# Altium PCB ESP32P4 SOM.PcbDoc (part 3 of 4)
Units mm, origin at the board's own origin, x right, y up, seen from the top; angles counter-clockwise.
Board outline 86.37 x 63.05 mm, 4 copper layers (L1-TOP, L2-GND, L3-GND/PWR, L4-BOT), stack 1.57 mm thick; 203 components, 172 nets, 736 pads, 1001 vias.
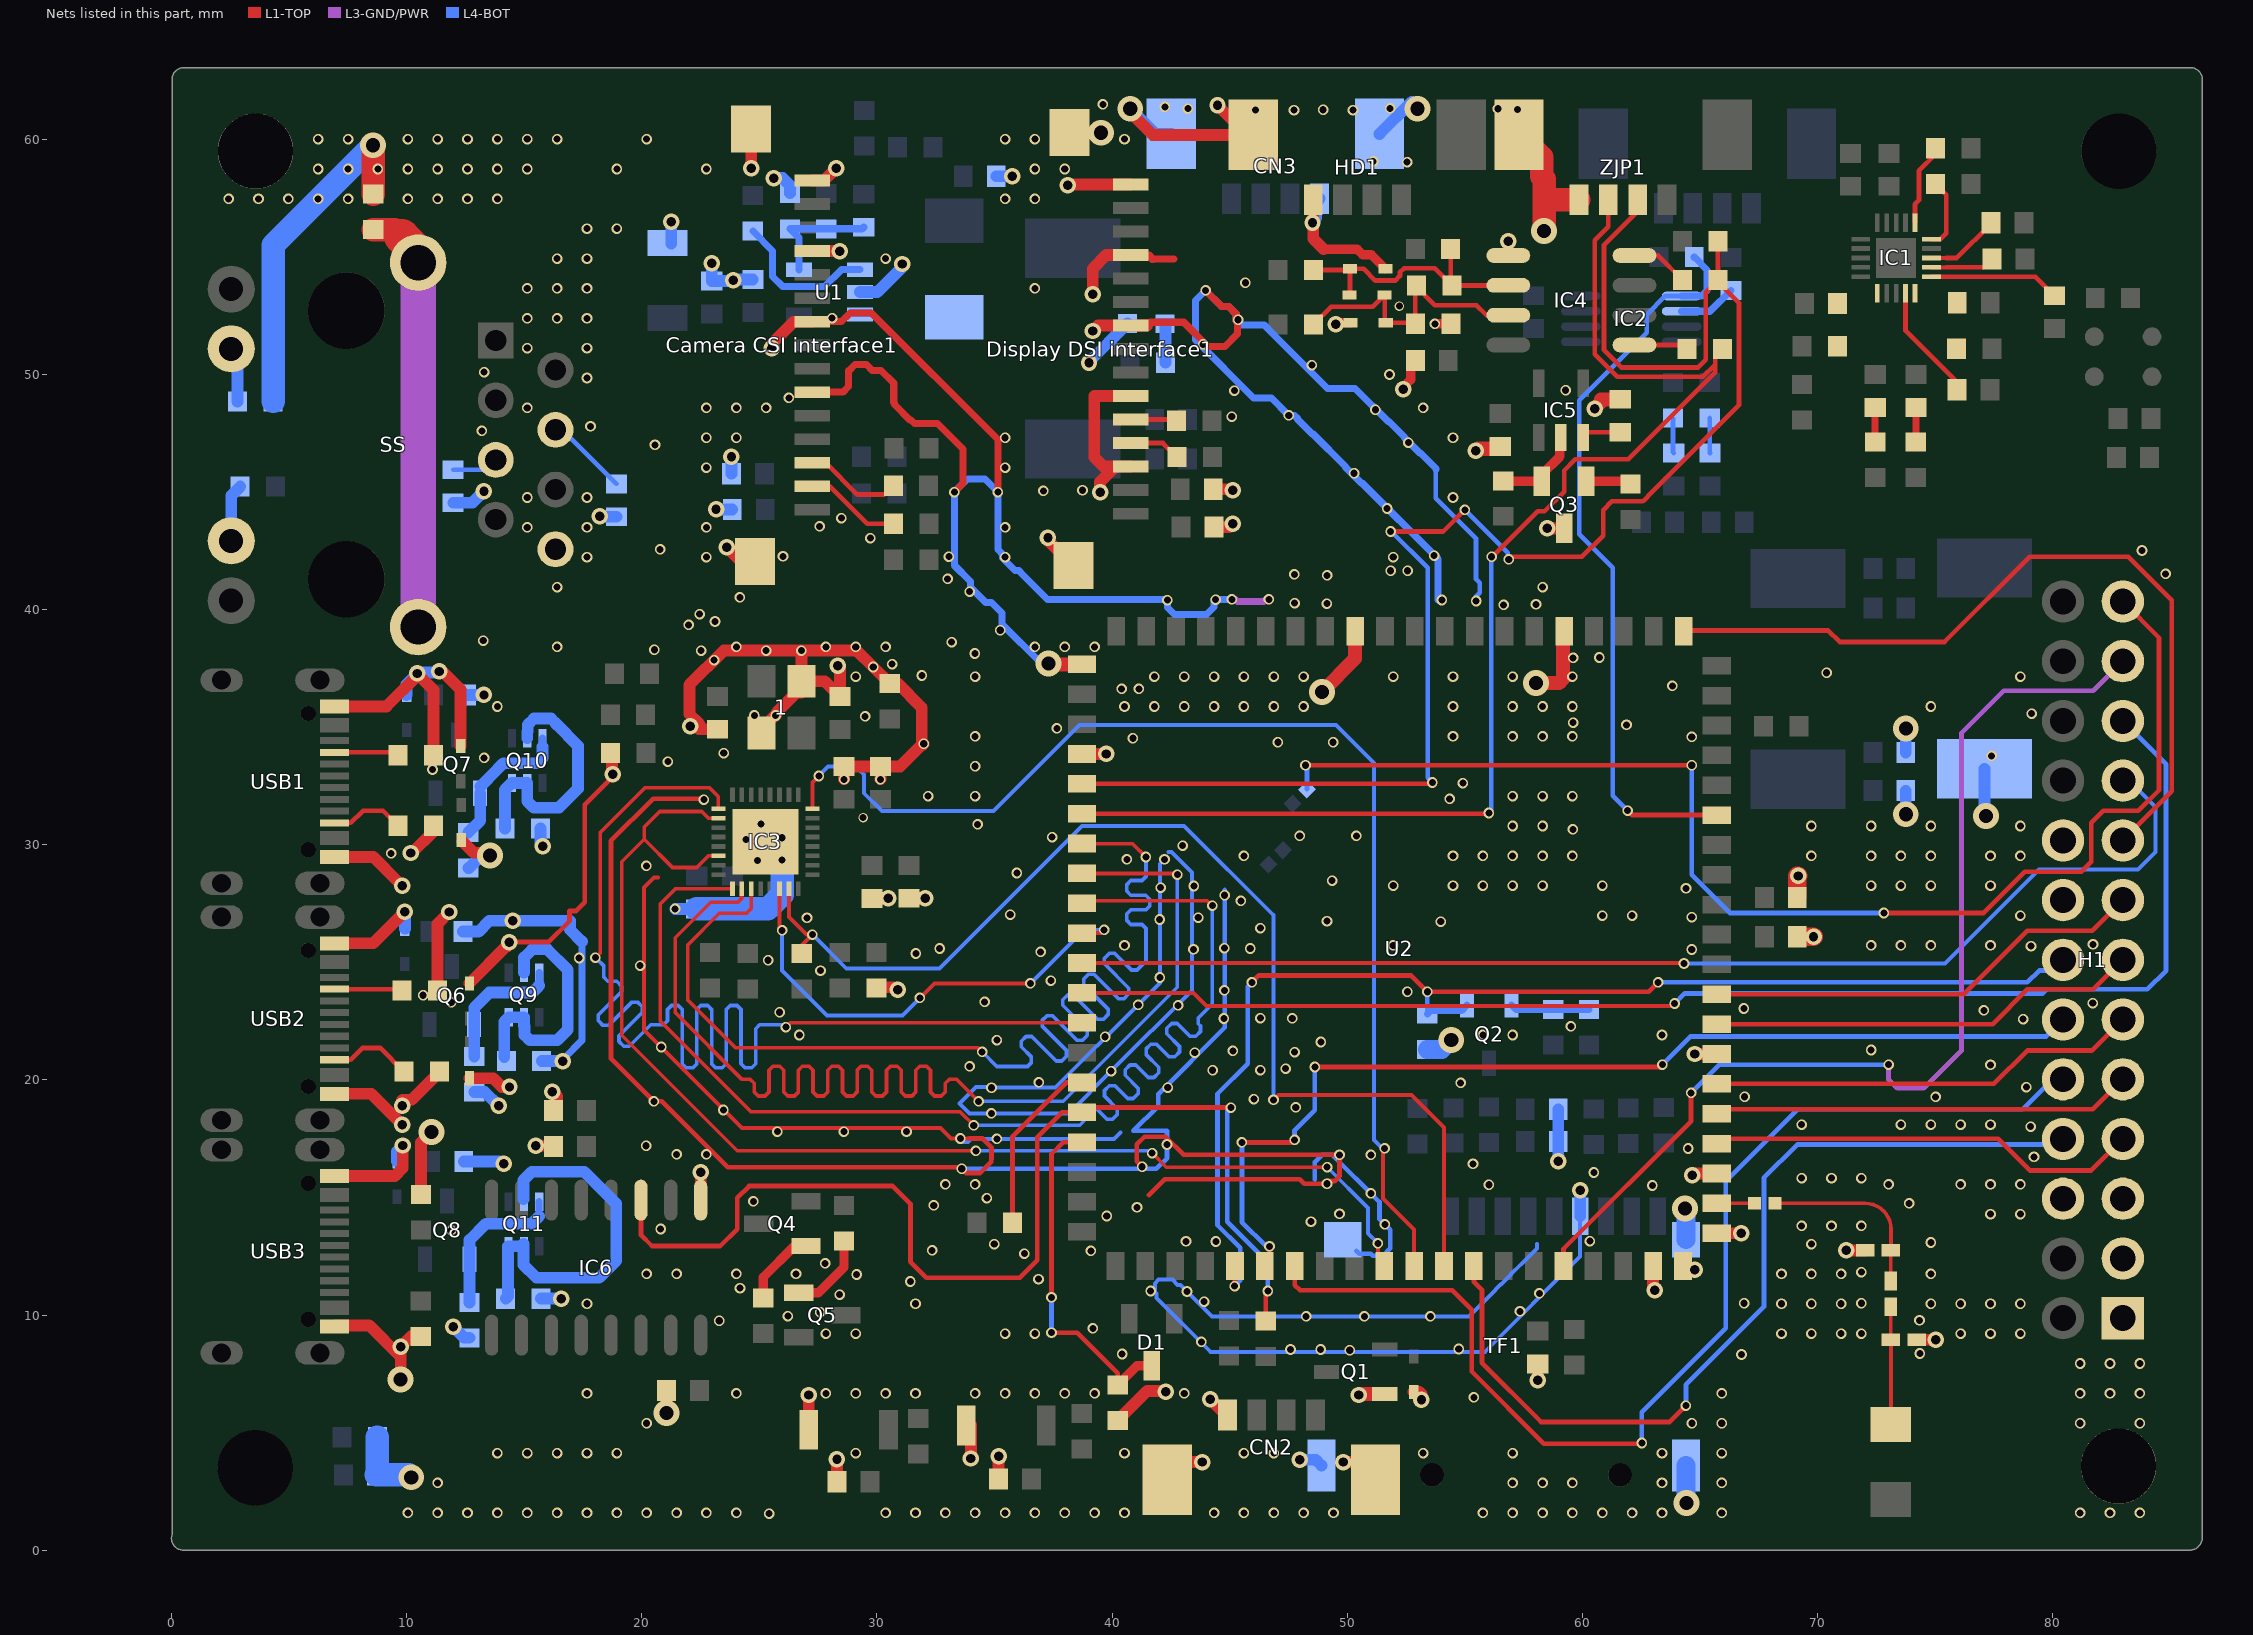
[diagram p5: the nets of this part, all layers, seen from the top]

## Via types
v1: diameter 0.45, hole 0.3, L1-TOP to L4-BOT, tented both sides, 789 vias
v2: diameter 0.7, hole 0.4, L1-TOP to L4-BOT, tented both sides, 101 vias
v3: diameter 1.1, hole 0.6, L1-TOP to L4-BOT, tented both sides, 75 vias
v4: diameter 0.45, hole 0.3, L1-TOP to L4-BOT, 33 vias
v5: diameter 0.4, hole 0.3, L1-TOP to L4-BOT, tented both sides, 2 vias
v6: diameter 1.1, hole 0.6, L1-TOP to L4-BOT, 1 vias

## Nets (pads, with @x,y where several pads share a name; then routed paths per layer and width w, separated by ;. In a path a pad name is that pad's centre, name@x,y a point inside that pad or via, vN(x,y) a via of type N, cw(c..) or ccw(c..) an arc to the next point about the centre after c; other vN are vias at no path point) (continued)
GND: 1.2 1.4 "Camera CSI interface1.1" "Camera CSI interface1.4" "Camera CSI interface1.7" "Camera CSI interface1.10" "Camera CSI interface1.16" "Camera CSI interface1.17" "Display DSI interface1.1" "Display DSI interface1.4" "Display DSI interface1.7" "Display DSI interface1.10" "Display DSI interface1.13" "Display DSI interface1.16" "Display DSI interface1.17" C4.1 C5.1 C6.1 C7.1 C8.1 C9.1 C30.1 C31.1 C32.1 C33.1 C34.1 C35.1 C36.2 C37.2 C38.1 C39.1 C40.1 C41.1 C42.1 C43.1 C44.1 C45.1 C46.1 C47.1 C48.2 C49.1 C50.1 C51.2 C52.2 C53.1 C54.1 C55.2 C56.1 C57.1 C58.1 C59.1 C60.1 C61.1 CN2.1 CN2.5 CN2.6 CN3.4 CN3.5 CN3.6 D2.1 D3.2 D5.2 D6.2 D7.1 D8.2 D9.2 D10.2 D11.1 D12.1 D13.1 F2.1 H1.1 H1.3 H1.5 H1.6 H1.16 H1.18 HD1.4 HD1.5 Hole2.1 Hole4.1 IC3.33 IC4.5 IC6.1 LED1.1 Q1.1 Q3.3 R4.2 R19.1 R26.1 R39.1 R45.2 R46.2 R47.1 R55.2 R57.1 R60.1 R61.1 R64.1 R68.1 R70.1 R71.1 R72.1 R73.1 R74.1 R75.1 R76.1 R79.1 R80.1 SS.8 SW1.1 SW2.1 TF1.6 TF1.10 TF1.11 TF1.12 TF1.13 U1.2 U2.1 U2.3 U2.7 U2.25 U2.32 U2.41 U2.44 U2.79 U2.80 USB1.A1B12 USB1.B1A12 USB2.A1B12 USB2.B1A12 USB3.A1B12 USB3.B1A12 ZJP1.4 ZJP1.5 | length 548.6
  L1-TOP w0.17: v2@9.648,28.417 v2(9.809,28.256) ; 20.7,28.6 20.53,28.6 20.104,28.174 20.104,22.119 20.826,21.396 24.263,17.96 32.711,17.96 33.161,17.51 v1(33.55,17.51) 33.939,17.51
  L1-TOP w0.2: v2(14.359,25.862) 16.033,25.862 16.93,26.759 16.93,27.188 17.215,27.188 17.581,27.554 17.581,31.71 18.773,32.902 v2(18.773,33) ; v1(22.646,31.917) 22.602,31.961 20.486,31.961 18.691,30.167 18.691,20.914 v1(20.515,19.09) 20.857,19.09 23.66,16.287 33.543,16.287 v1(33.609,16.221) 33.788,16.042 34.4,16.042 34.87,16.512 34.87,16.62 34.873,16.623 34.873,17.127 34.49,17.51 33.939,17.51 ; v1(41.284,16.307) 41.054,16.538 41.054,17.255 41.382,17.583 42.274,17.583 43.042,16.816 49.476,16.816 49.674,16.617 49.674,15.899 49.476,15.701 49.142,15.701 v1(49.142,15.584) 48.171,15.584 47.98,15.776 42.241,15.776 41.567,15.103
  L1-TOP w0.3: 27.253,49.247 28.557,49.247 28.792,49.482 28.792,50.174 28.827,50.174 29.076,50.422 29.552,50.422 29.801,50.174 30.179,50.174 30.717,49.636 30.717,48.807 30.745,48.779 30.745,48.724 31.396,48.072 31.451,48.072 31.603,47.921 32.571,47.921 33.666,46.826 33.666,45.371 v1(33.292,44.997) ; 27.253,52.247 28.495,52.247 28.854,52.606 29.774,52.606 35.146,47.235 v1(35.146,44.997) ; 40.796,55.083 41.586,55.083 41.651,55.019 41.651,54.945 41.695,54.901 41.769,54.901 41.778,54.911 42.644,54.911 ; 41.484,52.083 41.622,52.221 43.051,52.221 44.083,51.189 44.8,51.189 45.343,51.732 45.343,52.212 45.284,52.27 45.284,52.565 44.948,52.901 44.653,52.901 v1(43.978,53.577)
  L1-TOP w0.4: 48.997,55.329 50.424,55.329 50.663,55.09 51.029,55.09 D7.1@51.624,54.494 ; v2(49.519,52.129) 49.472,52.176 49.503,52.207 D3.2@50.142,52.207 ; v2(52.384,49.375) 52.384,49.456 52.7,49.773 52.7,50.4 C52.2@52.9,50.6 ; v1(53.732,52.156) R55.2@54.411,52.156 ; v2(56.848,55.674) 56.856,55.666 IC4.5@56.856,55.063
  L1-TOP w0.5: USB3.B1A12@6.935,9.51 6.984,9.56 8.403,9.56 9.747,8.216 ; USB3.A1B12@6.934,15.91 9.492,15.91 9.838,16.257 v2(9.838,17.21) ; USB2.B1A12@6.935,19.408 8.502,19.408 9.409,18.5 v2(9.809,18.101) ; USB2.A1B12@6.934,25.808 8.586,25.808 v2(9.927,27.15) ; USB1.B1A12@6.935,29.481 8.584,29.481 v2@9.648,28.417 ; USB1.A1B12@6.934,35.881 9.143,35.881 10.456,37.194 v2@10.456,37.281 ; v3(9.747,7.26) 9.747,8.216 ; v2(9.809,18.9) 9.809,19.129 9.835,19.154 10.216,19.154 11.39,20.328 R64.1@11.39,20.357 ; v2(10.18,29.65) 10.226,29.65 11.14,30.564 R61.1@11.14,30.813 ; v2(10.453,37.286) 10.453,37.284 v2@10.456,37.281 ; R70.1@10.607,9.085 10.174,9.085 v2(9.747,8.659) 9.747,8.216 ; R68.1@10.614,15.12 10.614,17.341 v3(11.063,17.789) ; R57.1@11.14,33.81 11.14,36.598 v2@10.456,37.281 ; R60.1@11.316,23.804 11.316,26.64 v2@11.817,27.141 ; v2(11.39,37.371) 11.429,37.332 11.564,37.332 12.296,36.601 D6.2@12.296,34.2 ; D5.2@12.366,30.15 12.854,29.662 13.426,29.662 v3(13.541,29.547) ; D9.2@12.676,20.07 13.68,20.07 14.05,19.7 v2(14.376,19.7) ; D8.2@12.676,24.108 14.246,25.678 14.265,25.678 14.265,25.767 v2(14.359,25.862) ; v2(15.5,17.2) 16.016,17.2 C57.1@16.252,16.964 ; v2(16.2,19.5) 16.4,19.3 16.4,18.848 C56.1@16.252,18.699 ; R46.2@18.673,33.9 18.735,33.838 18.735,33.038 v2(18.773,33) ; v3@20.876,5.65 v3(21.057,5.831) C55.2@21.057,6.798 ; v2(22.059,35.049) 22.097,35.011 22.337,35.011 22.437,34.911 C37.2@23.219,34.911 ; 22.437,35.151 22.026,35.562 22.026,36.797 23.489,38.26 v1(25.292,38.26) v1(26.792,38.26) ; IC6.1@22.507,14.888 v2(22.507,16.081) ; v2(23.612,42.648) 24.213,42.047 24.81,42.047 ; v2(24.653,58.777) 24.653,60.447 ; 1.2@25.092,34.753 25.092,34.909 v4@25.687,35.504 ; v2(25.526,51.117) 25.526,51.315 26.458,52.247 27.253,52.247 ; v4(25.692,35.499) v4@25.687,35.504 ; SW2.1@27.099,5.122 v2(27.099,6.6) ; 27.253,55.247 v2(28.429,55.247) ; 27.253,58.247 27.746,58.247 v2(28.276,58.777) ; C51.2@28.302,2.912 v2(28.302,3.872) ; v2(28.336,37.608) 28.43,37.514 C36.2@28.43,36.306 27.783,36.953 1.4@26.792,36.953 ; v1(28.605,32.783) C42.1@28.605,33.333 C45.1@30.152,33.333 ; C40.1@29.788,27.718 v2(30.478,27.718) ; R47.1@29.983,23.91 30.012,23.939 30.781,23.939 v2(30.88,23.84) ; v1(30.152,32.783) C45.1@30.152,33.333 ; C41.1@31.36,27.723 v2(32.05,27.723) ; v1@31.91,34.296 31.91,35.836 30.883,36.863 R45.2@30.544,36.863 v1(29.846,37.561) 29.147,38.26 29.101,38.26 v1(26.792,38.26) ; v1(31.992,34.296) 31.941,34.244 31.91,34.244 30.999,33.333 C45.1@30.152,33.333 ; v2(34,3.9) SW1.1@34,5.321 ; C48.2@35.173,3.03 35.173,3.997 v2(35.176,4) ; v2(37.276,43.05) 37.276,42.96 38.353,41.883 ; v2(38.126,58.05) 38.159,58.083 40.796,58.083 ; 38.196,60.283 v3(39.526,60.283) ; U2.44@38.72,33.862 v2(39.754,33.862) ; v2(39.176,51.85) 39.409,52.083 40.796,52.083 41.484,52.083 ; v2(39.176,53.421) 39.176,54.5 39.759,55.083 40.796,55.083 ; v2(39.493,44.997) 39.493,45.431 40.145,46.083 ; R19.1@40.25,5.525 41.495,6.771 42.225,6.771 42.252,6.798 42.255,6.798 42.289,6.764 v2(42.289,6.732) v2@42.321,6.732 ; v3(40.776,61.3) 40.776,61.15 41.736,60.19 HD1.5@45.754,60.19 ; 40.796,46.083 40.145,46.083 ; 40.796,49.083 39.253,49.083 39.24,49.07 39.24,46.486 39.643,46.083 40.145,46.083 ; CN2.6@42.356,3 43.106,3.75 v2(43.842,3.75) ; v2(44.184,6.412) 44.846,5.75 CN2.1@44.906,5.75 ; C35.1@44.303,45.122 45.096,45.122 v2(45.135,45.083) ; C34.1@44.338,43.517 44.991,43.517 v2(45.135,43.661) ; v2(44.486,61.458) HD1.5@45.754,60.19 ; HD1.5@46.007,60.19 HD1.5@45.754,60.19 ; v2(48.526,56.459) 48.557,56.428 48.557,55.769 48.997,55.329 ; v2@48.557,56.431 HD1.4@48.557,57.44 ; v2(49.826,3.75) 50.456,3.75 CN2.5@51.206,3 ; D2.1@52.825,6.736 53.064,6.736 53.16,6.64 v2(53.16,6.4) ; v2(58.105,7.23) 58.105,7.853 58.038,7.92 C47.1@58.105,7.92 ; v2(58.507,43.456) 59.214,43.456 Q3.3@59.226,43.469 ; U2.79@63.01,12.082 63.01,11.116 v2(63.076,11.05) ; U2.80@64.28,12.082 64.397,11.966 64.753,11.966 v2(64.791,11.927) ; v2(64.671,15.95) 64.598,16.022 U2.3@65.72,16.022 ; v2(64.778,21.102) U2.7@65.72,21.102 ; U2.1@65.638,13.482 U2.1@65.72,13.482 v2(66.754,13.482) ; v2(71.226,12.75) C61.1@72.036,12.75 ; C46.1@74.216,8.95 v2(75.026,8.95) ; v4@25.687,35.504 25.742,35.559 25.742,35.639 26.574,36.472 26.792,36.472 1.4@26.792,36.953 ; 1.4@26.792,36.953 v1(26.792,38.26)
  L1-TOP w0.6: v3(37.302,37.711) 37.341,37.672 U2.41@38.72,37.672 ; v3(48.926,36.5) 50.34,37.914 U2.32@50.34,39.082 ; v2(50.5,6.6) 50.535,6.635 Q1.1@51.396,6.635 ; v2(55.464,46.751) 55.492,46.751 55.585,46.844 56.408,46.844 C53.1@56.508,46.944 ; v3(58.038,36.883) 59.018,36.883 59.183,37.048 59.183,39.035 U2.25@59.23,39.082 ; v2(60.524,48.547) 60.511,48.56 60.788,48.837 60.788,48.944 C54.1@61.615,48.944
  L1-TOP w0.8: C49.1@69.144,26.086 v2@69.834,26.086 ; C50.1@69.144,27.754 69.144,28.674 v2(69.176,28.674)
  L1-TOP w1: R79.1@8.576,57.671 v3(8.576,59.75) ; ZJP1.5@57.307,60.19 58.266,59.231 58.266,58.422 58.375,58.314 58.375,57.45 ; v3(58.375,56.101) 58.375,57.45 ; ZJP1.4@59.857,57.44 58.384,57.44 58.375,57.45
  L3-GND/PWR w0.3: v1(45.096,40.438) 45.249,40.438 45.332,40.355 46.459,40.355 46.513,40.409 46.641,40.409 v1(46.67,40.438)
  L4-BOT w0.17: v1@33.55,17.363 33.87,17.363 34.002,17.495 v1(35.103,17.495) 40.087,17.495 40.355,17.764 ; v1(41.116,23.192) v1@41.112,23.196 ; v1(42.231,29.38) 42.04,29.189 42.04,28.177 42.04,24.123 v1@41.112,23.196 ; 42.413,29.697 42.53,29.697 43.4,28.827 43.4,26.9 43.4,23.807 v1(39.965,20.372) 38.173,18.58 v1(34.87,18.58) 33.947,18.58 33.521,19.006 34.208,19.693 34.848,19.693 v1(34.873,19.667) 37.584,19.667 v1@41.112,23.196 ; v3@52.746,61.6 52.996,61.35 v3(52.996,61.3) v3@53.276,61.58 ; 58.075,13.015 58.075,12.833 57.419,12.177 57.405,12.177 56.971,11.744 56.971,11.729 56.536,11.294 56.522,11.294 56.089,10.861 56.089,10.847 55.189,9.947 v1(53.542,9.947) v1(50.735,9.947) v1(48.255,9.947) 44.245,9.947 v1(43.19,11.001) 42.904,11.287 42.79,11.287 42.569,11.508 41.987,11.508 41.825,11.346 41.825,11.001 41.902,10.924 41.902,10.732 44.195,8.439 55.857,8.439 59.908,12.49 TF1.6@59.908,14.203
  L4-BOT w0.2: v1(33.609,16.221) 41.198,16.221 v1(41.284,16.307) 41.37,16.221 41.887,16.221 42.339,16.674 v1(42.339,17.254) 42.339,17.835 40.909,17.835 41.961,18.887 41.961,19.4 44.791,22.229 v1(44.791,27.854) 44.791,28.08 ; 48.624,15.764 48.624,16.506 48.932,16.814 49.168,16.814 49.17,16.816 49.172,16.814 49.367,16.814 49.674,16.506 v1(51.008,15.172) 51.372,14.808 51.372,14.086 51.835,13.623 51.835,12.833 51.527,12.525 51.093,12.525 51.008,12.609 50.508,12.609 TF1.13@50.391,12.727 ; 53.772,45.972 53.772,44.734 55.483,43.023 55.483,41.3 55.635,41.147 55.635,40.713 55.483,40.56 v1(55.483,40.367)
  L4-BOT w0.3: v2@16.688,20.764 16.688,20.917 17.457,21.686 17.457,25.884 ; v3(37.302,37.711) 36.999,37.711 35.329,39.381 35.329,39.851 34.88,40.299 34.631,40.299 33.98,40.95 33.98,41.2 33.292,41.888 v1(33.292,44.997) 33.845,45.55 34.593,45.55 v1(35.146,44.997) 35.146,42.553 35.346,42.353 35.346,42.192 35.873,41.665 36.034,41.665 36.239,41.459 37.261,40.438 42.359,40.438 42.359,40.097 42.665,39.792 44.021,39.792 44.338,40.109 44.338,40.438 v1(45.096,40.438) ; 53.772,45.972 53.774,45.972 53.774,46.007 53.123,46.658 53.086,46.658 52.434,47.31 52.434,47.347 51.783,47.998 51.746,47.998 50.334,49.41 49.168,49.41 46.871,51.706 46.476,52.101 45.454,52.101 45.284,52.27 45.284,52.565 44.948,52.901 44.653,52.901 v1(43.978,53.577) 43.544,53.143 43.544,51.479 46.024,48.999 46.78,48.999 v1(47.515,48.263) 47.755,48.263 47.88,48.139 47.88,48.112 48.531,47.461 48.558,47.461 49.935,46.083 49.935,46.055 50.595,45.395 50.623,45.395 53.872,42.147 53.872,40.404 54.024,40.404 v1(54.031,40.411)
  L4-BOT w0.5: D13.1@9.58,16.544 9.58,16.952 v2(9.838,17.21) ; D12.1@9.927,26.428 v2(9.927,27.15) ; D11.1@10.001,36.374 10.001,36.827 v2@10.456,37.281 ; v2(10.453,37.286) 10.456,37.283 v2@10.456,37.281 ; v2(11.39,37.371) 11.336,37.371 11.29,37.324 10.499,37.324 v2@10.456,37.281 ; v2(11.976,9.5) 12.444,9.032 R76.1@12.676,9.032 ; C38.1@11.98,44.548 12.799,44.548 v2(13.29,45.039) ; C59.1@12.396,26.31 13.059,26.31 13.519,26.77 v2(14.516,26.77) 16.944,26.77 16.944,26.397 17.457,25.884 ; C58.1@12.427,16.532 13.968,16.532 14.072,16.428 v2(14.126,16.428) ; C60.1@12.546,36.371 v2(13.29,36.371) ; R74.1@12.627,29.018 12.655,29.018 13.07,29.432 13.426,29.432 v3(13.541,29.547) ; R72.1@12.873,19.487 13.329,19.487 v2(13.916,18.9) ; R73.1@15.689,30.69 15.689,30.046 v2(15.794,29.941) ; R75.1@15.721,10.7 v2(16.576,10.7) ; R71.1@15.746,20.801 v2(16.636,20.801) ; v2(18.216,43.97) 18.236,43.95 C39.1@18.926,43.95 ; D10.2@21.255,55.562 v2(21.255,56.488) ; v1(21.421,27.272) C43.1@22.341,27.272 ; v2(22.981,54.732) C6.1@22.981,53.976 22.984,53.973 23.873,53.973 v2(23.9,54) 23.942,54.042 C5.1@24.726,54.042 ; v2(23.159,44.262) C33.1@23.849,44.263 ; C32.1@23.816,45.777 v2(23.816,46.507) ; v2(25.617,58.353) 25.996,58.353 26.304,58.044 R4.2@26.304,57.704 ; U1.2@29.285,53.506 30.019,53.506 31.076,54.564 v2(31.076,54.7) ; C4.1@35.075,58.428 v2@35.764,58.428 ; v2(39.021,50.506) 39.021,50.531 LED1.1@40.657,52.167 ; v3(40.776,61.3) 41.846,60.23 CN3.6@42.526,60.23 ; v2(47.976,3.85) 48.661,3.85 TF1.12@48.908,3.603 ; v2(48.526,56.459) 48.526,56.513 48.676,56.663 48.676,57.33 CN3.4@48.826,57.48 ; CN3.5@51.376,60.23 v3@52.746,61.6 ; v2(58.976,16.54) C31.1@58.976,17.377 C30.1@58.976,18.751 ; TF1.6@59.908,14.203 v2(59.908,15.312) ; v3(73.758,31.3) C8.1@73.758,32.301 ; C9.1@73.758,33.927 v3(73.758,34.95) ; F2.1@77.105,33.23 77.105,31.151 v3(77.176,31.221)
  L4-BOT w0.8: R26.1@53.409,21.296 54.022,21.296 v3(54.426,21.7) ; TF1.11@64.408,3.603 64.408,2.018 v3(64.426,2) ; TF1.10@64.408,13.203 64.408,14.532 v3(64.37,14.532) v3@64.438,14.6
  L4-BOT w1: R39.1@4.319,48.853 4.319,55.493 v3(8.576,59.75) ; C7.1@8.711,3.2 10.1,3.2 v6(10.2,3.1) ; C7.1@8.753,3.253 R80.1@8.753,4.8 ; C43.1@22.341,27.272 C44.1@23.864,27.272 25.363,27.272 25.969,27.878 v4(25.969,29.362) v4(25.969,30.3)
  other v1: 25.416,1.558 10.051,1.59 11.321,1.59 12.591,1.59 13.861,1.59 15.131,1.59 16.401,1.59 17.671,1.59 18.941,1.59 20.211,1.59 21.481,1.59 22.751,1.59 24.021,1.59 30.371,1.59 31.641,1.59 32.911,1.59 34.181,1.59 35.451,1.59 36.721,1.59 37.991,1.59 39.261,1.59 40.531,1.59 44.341,1.59 45.611,1.59 46.881,1.59 48.151,1.59 49.421,1.59 55.771,1.59 57.041,1.59 58.311,1.59 59.581,1.59 60.851,1.59 62.121,1.59 63.391,1.59 65.931,1.59 81.171,1.59 82.441,1.59 83.711,1.59 11.321,2.86 57.041,2.86 58.311,2.86 59.581,2.86 63.391,2.86 65.931,2.86 13.861,4.13 15.131,4.13 16.401,4.13 17.671,4.13 18.941,4.13 29.101,4.13 40.531,4.13 45.611,4.13 46.881,4.13 53.231,4.13 57.041,4.13 63.391,4.13 65.931,4.13 20.211,5.4 64.661,5.4 65.931,5.4 81.171,5.4 83.711,5.4 55.385,6.5 17.671,6.67 24.021,6.67 27.831,6.67 29.101,6.67 30.371,6.67 31.641,6.67 34.181,6.67 35.451,6.67 36.721,6.67 37.991,6.67 39.261,6.67 43.071,6.67 65.931,6.67 81.171,6.67 82.441,6.67 83.711,6.67 81.171,7.94 82.441,7.94 83.711,7.94 40.428,8.345 50.111,8.504 47.591,8.535 48.869,8.535 54.747,8.556 43.804,8.86 27.831,9.21 29.101,9.21 35.451,9.21 36.721,9.21 68.471,9.21 69.741,9.21 71.011,9.21 76.091,9.21 77.361,9.21 78.631,9.21 39.186,9.435 23.296,9.758 26.214,9.955 27.584,10.121 57.351,10.154 17.671,10.48 31.641,10.48 68.471,10.48 69.741,10.48 71.011,10.48 74.821,10.48 76.091,10.48 77.361,10.48 78.631,10.48 66.88,10.503 43.914,10.569 28.413,10.867 58.178,10.924 41.645,11.022 24.178,11.146 31.421,11.429 36.872,11.53 29.143,11.726 20.211,11.75 21.481,11.75 24.021,11.75 26.561,11.75 68.471,11.75 69.741,11.75 71.011,11.75 74.821,11.75 27.8,12.2 36.276,12.613 39.097,12.731 32.351,12.755 34.992,13.018 69.741,13.02 74.821,13.085 43.145,13.131 44.415,13.13 60.323,13.141 20.807,13.66 51.604,13.854 48.462,13.97 39.776,14.212 77.361,14.29 78.631,14.29 49.674,14.304 41.062,14.581 32.419,14.662 73.902,14.752 24.746,14.837 34.674,14.974 62.983,15.511 56.03,15.541 32.911,15.56 34.181,15.56 73.026,15.56 76.091,15.56 77.361,15.56 78.631,15.56 69.327,15.826 70.597,15.826 71.867,15.826 60.495,16.063 55.352,16.432 79.209,16.725 49.674,16.816 51.008,16.814 21.481,16.83 22.751,16.83 64.498,17.085 20.19,17.2 25.77,17.8 28.6,17.8 31.26,17.8 79.07,18.012 69.327,18.1 73.551,18.1 74.821,18.1 76.091,18.1 77.361,18.1 23.47,18.72 47.814,18.832 46.03,19.183 75.025,19.278 66.904,19.283 42.371,19.669 78.889,19.695 54.827,19.871 36.893,19.892 44.28,20.411 46.307,20.415 47.386,20.477 33.947,20.577 77.361,20.64 43.518,21.162 47.763,21.179 45.139,21.232 72.284,21.274 20.83,21.4 48.884,21.613 35.103,21.691 39.709,21.835 26.702,21.909 55.771,21.91 57.041,21.91 63.391,21.91 59.513,22.28 78.752,22.589 44.761,22.613 46.311,22.631 47.666,22.617 25.863,22.879 77.078,22.955 66.869,23.037 42.814,23.17 81.708,23.269 34.58,23.321 52.563,23.75 44.776,23.806 37.397,24.224 42.039,24.357 27.602,24.648 19.93,24.86 25.377,25.088 17.34,25.185 31.658,25.377 36.966,25.448 64.654,25.547 43.467,25.555 32.666,25.588 44.779,25.602 45.88,25.59 79.084,25.692 40.531,25.72 51.961,25.72 72.281,25.72 73.551,25.72 74.821,25.72 77.361,25.72 81.719,25.765 46.311,26.456 53.98,26.735 49.144,26.752 42.025,26.821 27.03,26.891 43.669,26.9 64.654,26.927 60.851,26.99 62.121,26.99 78.631,26.99 35.673,27.026 45.483,27.617 64.412,28.144 42.065,28.177 43.478,28.248 51.961,28.26 54.501,28.26 55.771,28.26 57.041,28.26 58.311,28.26 60.851,28.26 72.281,28.26 73.551,28.26 74.821,28.26 77.361,28.26 49.364,28.475 35.952,28.802 20.2,29.1 40.633,29.38 45.611,29.53 54.501,29.53 55.771,29.53 57.041,29.53 58.311,29.53 59.581,29.53 69.741,29.53 72.281,29.53 73.551,29.53 74.821,29.53 77.361,29.53 78.631,29.53 9.341,29.637 43.005,29.964 37.45,30.322 47.985,30.379 50.389,30.379 59.602,30.656 57.041,30.8 58.311,30.8 69.741,30.8 72.281,30.8 74.821,30.8 78.631,30.8 34.287,30.872 54.36,31.95 32.177,32.065 34.181,32.07 57.041,32.07 58.311,32.07 59.581,32.07 54.92,32.62 34.181,33.34 21.111,33.535 77.406,33.784 23.489,33.9 47.052,34.361 49.402,34.361 40.89,34.53 64.654,34.591 34.181,34.61 54.501,34.61 57.041,34.61 58.311,34.61 59.581,34.61 37.654,34.948 61.878,35.103 59.611,35.194 29.5,35.46 79.111,35.574 13.861,35.88 40.531,35.88 41.801,35.88 43.071,35.88 44.341,35.88 45.611,35.88 46.881,35.88 48.151,35.88 54.501,35.88 57.041,35.88 58.311,35.88 59.581,35.88 74.821,35.88 40.405,36.627 41.14,36.627 63.83,36.759 29.101,37.15 34.181,37.15 41.801,37.15 43.071,37.15 44.341,37.15 45.611,37.15 46.881,37.15 48.151,37.15 51.961,37.15 54.501,37.15 57.041,37.15 59.581,37.15 78.631,37.15 31.91,37.199 70.39,37.316 23.076,37.85 59.607,37.949 60.725,37.965 34.169,38.134 22.522,38.26 20.536,38.295 16.401,38.42 24.021,38.42 27.831,38.42 29.101,38.42 30.371,38.42 36.721,38.42 37.991,38.42 39.261,38.42 33.175,38.62 13.261,38.679 35.247,39.125 21.992,39.35 23.115,39.495 22.463,39.81 56.654,40.204 58.03,40.221 49.135,40.255 47.769,40.274 42.356,40.406 44.409,40.424 24.174,40.519 33.948,40.765 16.401,40.96 58.311,40.96 33.011,41.305 84.808,41.524 51.846,41.654 52.57,41.654 17.671,42.23 22.751,42.23 35.451,42.23 51.961,42.23 33.058,42.253 53.7,42.3 83.804,42.514 20.782,42.567 29.727,43.038 15.131,43.5 17.671,43.5 22.751,43.5 35.451,43.5 27.567,43.542 28.487,43.89 51.7,44.3 15.131,44.77 17.671,44.77 54.501,44.77 37.08,45.049 38.744,45.079 50.3,45.8 22.751,46.04 35.451,46.04 20.563,47.004 52.6,47.1 22.751,47.31 24.021,47.31 35.451,47.31 54.501,47.31 17.82,47.795 45.091,48.207 51.2,48.5 15.131,48.58 22.751,48.58 24.021,48.58 25.291,48.58 53.231,48.58 45.203,49.316 59.289,49.33 17.671,49.85 51.8,50 48.5,50.4 15.131,51.12 17.671,51.12 43.875,51.285 45.366,52.328 15.131,52.39 16.401,52.39 17.671,52.39 15.131,53.66 16.401,53.66 17.671,53.66 36.721,53.66 45.675,53.902 16.401,54.93 17.671,54.93 30.371,54.93 17.671,56.2 18.941,56.2 2.431,57.47 3.701,57.47 4.971,57.47 6.241,57.47 7.511,57.47 10.051,57.47 11.321,57.47 12.591,57.47 13.861,57.47 35.451,57.47 36.721,57.47 6.241,58.74 7.511,58.74 8.781,58.74 10.051,58.74 11.321,58.74 12.591,58.74 13.861,58.74 15.131,58.74 18.941,58.74 22.751,58.74 36.721,58.74 37.991,58.74 52.548,59.03 51.103,59.059 6.241,60.01 7.511,60.01 10.051,60.01 11.321,60.01 12.591,60.01 13.861,60.01 15.131,60.01 16.401,60.01 20.211,60.01 35.451,60.01 36.721,60.01 40.531,60.01 47.738,61.242 50.248,61.242 46.103,61.251 48.975,61.26 57.245,61.268 43.226,61.306 51.826,61.315 56.408,61.301 42.248,61.38 39.609,61.491
  other v2: 69.834,26.086 11.817,27.141 35.765,58.429
  other v4: 66.771,8.323 74.354,8.367 71.865,9.21 74.342,9.778 71.865,10.503 71.865,11.823 11.9,13.6 69.327,13.793 70.597,13.793 71.865,13.793 11.9,23.3 10.7,23.6 24.921,29.34 24.443,30.225 25.066,30.875 11.1,33.2 13.3,33.7 24.786,35.499 30.652,37.683 49.145,41.455 47.755,41.498 26.007,42.265 13.2,47.6 26.261,49.005 13.3,50.1 28.1,52.4
  other v5: 29.412,31.157 52.217,52.91
GNDETH: R79.2 SS.13 SS.14 | length 18.2
  L1-TOP w1: R79.2@8.576,56.165 9.499,56.165 9.792,55.872
  L1-TOP w1.5: 9.792,55.872 10.492,55.172 SS.13@10.492,54.757
  L3-GND/PWR w1.5: SS.14@10.492,39.257 SS.13@10.492,54.757
GPIO0: H1.23 U2.76 | length 44.8
  L1-TOP w0.2: U2.76@59.2,12.082 59.2,12.824 64.626,18.25 v1(64.626,19.45) v1@64.726,19.55
  L3-GND/PWR w0.2: v1(73.026,20.65) 73.026,20.015 73.391,19.65 74.526,19.65 76.126,21.25 76.126,34.75 77.926,36.55 81.729,36.55 H1.23@82.987,37.808
  L4-BOT w0.2: v1(64.626,19.45) 65.826,20.65 v1(73.026,20.65)
GPIO1: H1.7 U2.4 | length 18.5
  L1-TOP w0.2: U2.4@65.72,17.292 65.926,17.498 77.69,17.498 79.037,16.15 81.649,16.15 H1.7@82.987,17.488
GPIO2: H1.9 U2.5 | length 17.9
  L1-TOP w0.2: U2.5@65.72,18.562 65.908,18.75 81.709,18.75 H1.9@82.987,20.028
GPIO3: H1.11 U2.6 | length 18.4
  L1-TOP w0.2: U2.6@65.72,19.832 77.508,19.832 78.926,21.25 81.669,21.25 H1.11@82.987,22.568
GPIO4: H1.13 U2.8 | length 18.4
  L1-TOP w0.2: U2.8@65.72,22.372 77.448,22.372 78.926,23.85 81.729,23.85 H1.13@82.987,25.108
GPIO5: H1.15 U2.9 | length 18.9
  L1-TOP w0.2: U2.9@65.72,23.642 76.218,23.642 78.926,26.35 81.689,26.35 H1.15@82.987,27.648
GPIO20: H1.17 U2.21 | length 34.3
  L1-TOP w0.2: U2.21@64.31,39.082 64.339,39.111 70.464,39.111 70.947,38.628 75.404,38.628 79.026,42.25 83.226,42.25 85.07,40.406 85.07,32.271 H1.17@82.987,30.188
GPIO26: R59.1 R62.1 U2.45 ZJP1.2 | length 68.7
  L1-TOP w0.2: U2.45@38.72,32.592 53.568,32.592 v1(53.626,32.65) ; v1(51.846,43.323) 54.086,43.323 v1(55.006,44.243) ; v1(56.872,42.138) 56.859,42.15 56.959,42.25 57.738,42.25 59.985,42.25 60.885,43.15 60.885,44.235 61.254,44.604 62.565,44.604 62.596,44.634 62.605,44.634 62.78,44.809 62.78,44.819 66.663,48.701 66.663,53.054 65.768,53.949 R59.1@65.768,54.019 ; ZJP1.2@62.357,57.44 62.357,56.942 60.926,55.511 60.926,51.034 61.661,50.299 64.927,50.299 65.257,50.628 65.257,53.507 R59.1@65.768,54.019 ; R62.1@65.768,55.661 R59.1@65.768,54.019
  L4-BOT w0.2: v1(51.846,43.323) 51.882,43.323 53.422,41.784 53.422,32.854 v1(53.626,32.65) ; v1(55.006,44.243) 56.824,42.425 56.824,42.186 v1(56.872,42.138)
GPIO27: R56.1 U2.46 ZJP1.3 | length 55.2
  L1-TOP w0.2: U2.46@38.72,31.322 55.998,31.322 v1(56.026,31.35) ; v1(56.141,42.25) 56.172,42.25 58.108,44.185 58.392,44.185 59.226,45.019 59.226,45.918 59.702,46.393 61.963,46.393 65.657,50.087 65.657,50.424 ; ZJP1.3@61.107,57.44 61.107,56.285 60.526,55.704 60.526,50.868 61.495,49.899 65.131,49.899 65.657,50.424 ; R56.1@65.96,51.084 65.657,50.781 65.657,50.424
  L4-BOT w0.2: v1(56.026,31.35) 56.126,31.45 56.126,42.235 v1(56.141,42.25)
GPIO28: IC3.19 U2.47 | length 53.8
  L1-TOP w0.156: IC3.19@24.659,28.129 24.659,27.288 24.456,27.085 23.299,27.085 21.956,25.742 21.956,23.4 23.986,21.37 34.305,21.37 v1(34.48,21.195) ; U2.47@38.72,30.052 38.735,30.038 40.886,30.038 v1(41.442,29.482)
  L4-BOT w0.156: v1(34.48,21.195) 35.103,20.572 36.292,20.572 36.403,20.572 36.572,20.741 36.572,20.979 36.144,21.407 36.144,21.645 36.347,21.849 36.585,21.849 37.626,20.808 37.864,20.808 38.067,21.011 38.067,21.249 37.027,22.29 37.027,22.529 37.23,22.732 37.468,22.732 38.509,21.691 38.747,21.691 38.95,21.894 38.95,22.133 37.91,23.173 37.91,23.412 38.113,23.615 38.351,23.615 39.392,22.574 39.63,22.574 39.834,22.777 39.834,23.016 38.793,24.056 38.793,24.295 38.996,24.498 39.235,24.498 40.275,23.457 40.514,23.457 40.717,23.66 40.717,23.899 39.676,24.94 39.676,25.178 39.879,25.381 40.118,25.381 40.827,24.671 41.066,24.671 41.389,24.994 41.442,25.048 41.442,26.36 41.442,26.438 41.274,26.607 40.802,26.607 40.633,26.776 40.633,27.063 40.802,27.231 41.433,27.231 41.601,27.4 41.601,27.687 41.433,27.856 40.802,27.856 40.633,28.024 40.633,28.312 40.802,28.48 41.274,28.48 41.442,28.649 41.442,29.043 v1(41.442,29.482)
GPIO29: IC3.18 U2.48 | length 54.7
  L1-TOP w0.156: IC3.18@24.259,28.129 24.244,28.114 24.244,27.713 24.244,27.711 24.091,27.558 24.081,27.558 24.074,27.551 23.644,27.551 23.637,27.558 22.933,27.558 21.421,26.047 21.421,22.87 24.269,20.022 24.62,20.022 24.789,19.854 24.789,19.481 24.957,19.312 25.245,19.312 25.413,19.481 25.413,20.408 25.582,20.577 25.869,20.577 26.038,20.408 26.038,19.481 26.206,19.312 26.494,19.312 26.662,19.481 26.662,20.408 26.831,20.577 27.118,20.577 27.287,20.408 27.287,19.481 27.455,19.312 27.742,19.312 27.911,19.481 27.911,20.408 28.08,20.577 28.367,20.577 28.536,20.408 28.536,19.481 28.704,19.312 28.991,19.312 29.16,19.481 29.16,20.408 29.329,20.577 29.616,20.577 29.784,20.408 29.784,19.481 29.953,19.312 30.24,19.312 30.409,19.481 30.409,20.408 30.578,20.577 30.865,20.577 31.033,20.408 31.033,19.481 31.202,19.312 31.489,19.312 31.658,19.481 31.658,20.408 31.826,20.577 32.114,20.577 32.282,20.408 32.282,19.481 32.451,19.312 32.738,19.312 32.907,19.481 32.907,19.854 33.075,20.022 33.154,20.022 33.394,20.022 v1(34.326,19.09) ; U2.48@38.72,28.782 42.724,28.782 v1(42.776,28.73)
  L4-BOT w0.156: v1(34.326,19.09) 37.929,19.09 42.776,23.937 v1(42.776,28.73)
GPIO30: IC3.17 U2.49 | length 54
  L1-TOP w0.156: IC3.17@23.859,28.129 21.432,28.129 20.788,27.486 20.788,22.509 24.657,18.64 33.55,18.64 v1(34.12,18.07) ; U2.49@38.72,27.512 38.825,27.617 44.042,27.617 44.249,27.41 v1(44.266,27.41)
  L4-BOT w0.156: v1(34.12,18.07) 34.122,18.072 38.47,18.072 38.632,18.072 38.8,18.241 38.8,18.666 39.003,18.87 39.242,18.87 39.786,18.326 40.024,18.326 40.227,18.529 40.227,18.767 39.683,19.311 39.683,19.55 39.886,19.753 40.125,19.753 40.669,19.209 40.907,19.209 41.11,19.412 41.11,19.65 40.566,20.194 40.566,20.433 40.77,20.636 41.008,20.636 41.542,20.101 41.781,20.101 41.984,20.305 41.984,20.543 41.45,21.077 41.45,21.316 41.653,21.519 41.891,21.519 42.425,20.985 42.664,20.985 42.867,21.188 42.867,21.426 42.333,21.961 42.333,22.199 42.536,22.402 42.774,22.402 43.318,21.858 43.557,21.858 43.76,22.061 43.76,22.3 43.667,22.392 43.667,22.631 43.925,22.888 44.266,23.229 v1(44.266,27.41)
GPIO31: IC3.22 U2.50 | length 20.5
  L1-TOP w0.17: IC3.22@25.859,28.129 25.859,26.466 v1(25.969,26.356) ; v1(31.826,23.491) 32.446,24.11 v1(36.53,24.11) ; U2.50@38.72,26.242 39.526,26.242 v1(39.666,26.382)
  L4-BOT w0.17: v1(25.969,26.356) 25.969,24.663 27.887,22.745 31.08,22.745 v1(31.826,23.491) ; v1(36.53,24.11) 38.802,26.382 v1(39.666,26.382)
GPIO32: H1.19 U2.51 | length 51.4
  L1-TOP w0.17: U2.51@38.72,24.972 64.304,24.972 v1(64.326,24.95)
  L4-BOT w0.17: v1(64.326,24.95) 75.426,24.95 79.426,28.95 83.626,28.95 84.369,29.693 84.369,31.607 83.248,32.728 H1.19@82.987,32.728
GPIO33: H1.21 U2.52 | length 58.3
  L1-TOP w0.17: U2.52@38.72,23.702 43.474,23.702 44.026,23.15 v1@63.826,23.15
  L1-TOP w0.2: v1@63.826,23.15 v1(63.926,23.25)
  L4-BOT w0.2: v1(63.926,23.25) 64.355,23.679 79.584,23.679 79.755,23.85 84.026,23.85 84.826,24.65 84.826,33.429 H1.21@82.987,35.268
GPIO34: IC3.9 U2.53 | length 54.7
  L1-TOP w0.156: v1(18.032,25.2) 18.233,25.401 18.233,30.527 20.126,32.42 22.888,32.42 23.259,32.049 IC3.9@23.259,31.53 ; v1(26.129,22.245) 26.316,22.432 U2.53@38.72,22.432
  L4-BOT w0.156: v1(18.032,25.2) 18.39,24.842 18.39,24.57 18.39,24.361 18.559,24.193 18.937,24.193 19.14,23.99 19.14,23.751 18.149,22.76 18.149,22.522 18.353,22.319 18.591,22.319 19.582,23.31 19.82,23.31 20.023,23.106 20.023,22.868 19.033,21.877 19.033,21.639 19.236,21.436 19.474,21.436 20.384,22.345 20.692,22.345 20.803,22.345 20.851,22.345 20.929,22.345 21.097,22.514 21.097,22.998 21.266,23.167 21.553,23.167 21.722,22.998 21.722,20.691 21.89,20.522 22.178,20.522 22.346,20.691 22.346,22.998 22.515,23.167 22.802,23.167 22.971,22.998 22.971,20.691 23.139,20.522 23.427,20.522 23.595,20.691 23.595,22.998 23.764,23.167 24.051,23.167 24.22,22.998 24.22,20.691 24.388,20.522 24.676,20.522 24.844,20.691 24.844,22.177 25.013,22.345 25.183,22.345 26.029,22.345 v1(26.129,22.245)
GPIO36: R50.2 U2.55 | length 7.6
  L1-TOP w0.2: R50.2@35.772,13.928 35.772,17.596 38.068,19.892 U2.55@38.72,19.892
GPIO37: IC6.3 R17.2 U2.56 | length 47.6
  L1-TOP w0.2: IC6.3@19.967,14.888 19.967,13.406 20.437,12.937 23.341,12.937 24.059,13.655 24.059,14.983 24.563,15.487 30.676,15.487 31.426,14.737 31.426,12.274 32.109,11.592 36.085,11.592 36.826,12.332 36.826,17.572 37.877,18.622 U2.56@38.72,18.622 38.923,18.825 v1(45.054,18.825) ; R17.2@46.532,9.739 46.532,10.928 v1(46.626,11.022)
  L4-BOT w0.2: v1(45.054,18.825) 44.904,18.676 44.904,13.97 46.626,12.248 v1(46.626,11.022)
GPIO38: D1.3 R19.2 U2.57 | length 14.9
  L1-TOP w0.2: v1(37.426,9.25) 38.526,9.25 40.25,7.526 R19.2@40.25,7.032 ; v1(37.426,10.75) 37.426,16.85 37.928,17.352 U2.57@38.72,17.352
  L1-TOP w0.4: R19.2@40.25,7.032 41.064,7.846 D1.3@41.688,7.846
  L4-BOT w0.2: v1(37.426,9.25) v1(37.426,10.75)
GPIO45: H1.14 Q2.1 R26.2 U2.65 | length 53.1
  L1-TOP w0.2: v1(45.216,11.23) U2.65@45.216,12.068 ; v1(45.944,24.147) 46.243,24.445 52.714,24.445 v1(53.409,23.75) 62.826,23.75 v1(63.226,24.15)
  L1-TOP w0.3: U2.65@45.216,12.068 U2.65@45.23,12.082
  L4-BOT w0.2: v1(45.216,11.23) 45.455,11.469 45.455,12.853 44.486,13.822 44.486,19.41 45.769,20.693 45.769,23.971 v1(45.944,24.147) ; R26.2@53.409,22.803 v1(53.409,23.75) ; v1(63.226,24.15) 78.929,24.15 79.429,24.65 79.989,24.65 H1.14@80.447,25.108
  L4-BOT w0.3: R26.2@53.409,22.803 53.57,22.964 54.872,22.964 Q2.1@55.09,23.182
GPIO46: H1.12 U2.66 | length 44.3
  L1-TOP w0.2: v1(45.526,17.341) 47.651,17.341 v1(47.763,17.453) ; U2.66@46.5,12.082 46.696,12.278 v1(46.696,12.92) ; v1(48.626,20.55) 63.305,20.55 v1(63.405,20.65)
  L4-BOT w0.2: v1(45.526,17.341) 45.526,13.95 46.556,12.92 v1(46.696,12.92) ; v1(47.763,17.453) 47.763,17.853 48.626,18.716 v1(48.626,20.55) ; v1(63.405,20.65) 64.605,21.85 79.729,21.85 H1.12@80.447,22.568
GPIO47: H1.10 U2.67 | length 48.7
  L1-TOP w0.2: U2.67@47.77,12.082 47.77,11.277 47.998,11.05 54.47,11.05 55.3,10.22 55.3,7.6 58.368,4.532 62.504,4.532 v1(62.532,4.56)
  L4-BOT w0.2: v1(62.532,4.56) 62.526,4.566 62.526,5.859 66.104,9.437 66.104,15.692 69.162,18.75 78.733,18.75 80.011,20.028 H1.10@80.447,20.028
GPIO49: H1.25 R78.2 | length 54.5
  L1-TOP w0.2: v1(48.227,33.383) v1(64.654,33.383) ; v1(72.826,27.1) 77.076,27.1 78.826,28.85 81.226,28.85 81.647,29.271 81.647,30.942 82.155,31.45 83.649,31.45 84.526,32.327 84.526,38.809 H1.25@82.987,40.348
  L4-BOT w0.2: v1(48.227,33.383) 48.291,33.319 R78.2@48.291,32.356 ; v1(64.654,33.383) 64.654,28.722 66.276,27.1 v1(72.826,27.1)
GPIO50: IC3.10 IC3.14 U2.70 | length 54.2
  L1-TOP w0.156: IC3.14@23.259,29.53 22.835,29.53 22.34,29.035 21.309,29.035 20.104,30.24 ; IC3.10@23.259,31.129 22.835,31.129 22.551,31.414 20.762,31.414 20.104,30.755 20.104,30.24 ; v1(34.213,16.985) 24.061,16.985 19.148,21.899 19.148,29.284 20.104,30.24 ; v1(41.71,16.89) 42.311,16.289 v1(49.149,16.289) ; v1(51.31,13.05) 51.31,12.353 U2.70@51.58,12.082
  L4-BOT w0.156: v1(34.213,16.985) 41.615,16.985 v1(41.71,16.89) ; v1(49.149,16.289) 50.887,14.552 50.887,13.473 v1(51.31,13.05)
GPIO51: IC3.32 U2.71 | length 51
  L1-TOP w0.17: IC3.32@27.259,31.53 27.259,32.65 v1(27.533,32.923) ; v1(51.597,17.089) 51.56,17.089 51.527,17.057 51.527,14.949 51.76,14.716 52.841,13.635 U2.71@52.841,12.092
  L4-BOT w0.17: v1(27.533,32.923) 27.533,32.95 27.915,33.333 29.107,33.333 29.442,32.998 29.442,32.208 30.216,31.434 34.96,31.434 38.619,35.093 49.524,35.093 51.141,33.476 51.141,17.443 51.527,17.057 51.56,17.089 v1(51.597,17.089)
GPIO52: IC3.23 R38.1 U2.72 | length 49.5
  L1-TOP w0.17: IC3.23@26.259,28.129 26.259,26.934 27.014,26.179 v1(27.259,26.179) 26.802,25.721 R38.1@26.802,25.377 ; v1(46.866,19.15) 47.071,19.355 52.735,19.355 54.121,17.968 54.121,12.059 U2.72@54.138,12.043
  L4-BOT w0.17: v1(27.259,26.179) 28.698,24.74 32.666,24.74 38.727,30.801 43.068,30.801 46.866,27.003 v1(46.866,19.15)
GPIO53: H1.8 U2.73 | length 38.7
  L1-TOP w0.2: U2.73@55.39,12.082 55.39,11.41 55.733,11.067 55.733,7.967 58.244,5.456 63.714,5.456 v1(64.408,6.15)
  L4-BOT w0.2: v1(64.408,6.15) 64.408,7.04 67.726,10.358 67.726,15.834 69.142,17.25 80.209,17.25 H1.8@80.447,17.488
LAN: R49.2 U2.2 | length 1.6
  L1-TOP w0.156: U2.2@65.72,14.752 R49.2@67.326,14.752
LAN_OUT: C61.2 L2.2 R49.1 | length 7.8
  L1-TOP w0.156: R49.1@68.192,14.752 72.036,14.752 cw(c72.036,13.662) 73.126,13.662 C61.2@73.126,12.75 73.124,12.75 L2.2@73.124,11.45
NetANT1_2: ANT1.2 C46.2 L2.1 | length 5
  L1-TOP w0.156: ANT1.2@73.124,5.35 73.126,5.352 C46.2@73.126,8.95 73.124,8.952 L2.1@73.124,10.36
NetC2_1: C2.1 R3.1 R4.1 U1.5 | length 5.1
  L4-BOT w0.3: U1.5@26.685,54.456 26.685,55.817 R4.1@26.304,56.198 R3.1@27.85,56.198 29.376,56.198 C2.1@29.442,56.263
NetC12_1: C12.1 IC1.18 | length 3.2
  L1-TOP w0.17: IC1.18@74.846,54.955 75.475,54.955
  L1-TOP w0.2: 75.476,54.955 75.93,54.955 77.384,56.409 C12.1@77.384,56.451
NetC13_2: C13.2 R6.1 | length 1.5
  L4-BOT w0.2: R6.1@63.859,48.144 63.859,46.689 C13.2@63.89,46.658
NetC14_2: C14.2 IC1.17 | length 2.7
  L1-TOP w0.17: IC1.17@74.846,54.555 75.476,54.555
  L1-TOP w0.2: 75.476,54.555 76.096,54.555 77.069,54.555 C14.2@77.427,54.913
NetC16_2: C16.2 IC1.16 | length 5.6
  L1-TOP w0.2: IC1.16@74.846,54.155 79.271,54.155 C16.2@80.076,53.35
NetC18_2: C18.2 R8.1 | length 1.5
  L4-BOT w0.2: R8.1@65.417,48.149 65.417,46.676 C18.2@65.435,46.658
NetC19_2: C19.2 IC1.15 R9.1
NetC20_2: C20.2 IC1.14 | length 5
  L1-TOP w0.2: IC1.14@73.746,53.455 73.746,51.86 75.936,49.67 C20.2@75.936,49.35
NetC21_1: C21.1 R11.1 | length 1.5
  L1-TOP w0.3: R11.1@74.185,47.128 C21.1@74.185,48.595
NetC22_1: C22.1 R12.1 | length 1.5
  L1-TOP w0.3: R12.1@72.456,47.128 C22.1@72.456,48.595
NetC26_2: C26.2 IC2.2 | length 2.5
  L4-BOT w0.3: IC2.2@64.231,52.689 65.434,52.689 C26.2@66.318,53.573
NetC27_1: C27.1 IC1.11 R14.1
NetC38_2: C38.2 SS.5 | length 2
  L4-BOT w0.204: C38.2@11.98,45.948 13.373,45.948 SS.5@13.792,46.367
NetC39_2: C39.2 SS.4 | length 3.5
  L4-BOT w0.204: SS.4@16.332,47.647 16.629,47.647 C39.2@18.926,45.35
NetC54_2: C54.2 IC5.3 | length 1.7
  L1-TOP w0.2: IC5.3@60.043,47.324 60.263,47.544 C54.2@61.615,47.544
"NetCamera CSI interface1_13": "Camera CSI interface1.13" R32.2 | length 4.2
  L1-TOP w0.2: 27.253,46.247 27.819,46.247 29.172,44.894 30.319,44.894 R32.2@30.698,45.274
"NetCamera CSI interface1_14": "Camera CSI interface1.14" R34.2 | length 4.1
  L1-TOP w0.2: 27.253,45.247 27.989,45.247 29.586,43.65 R34.2@30.709,43.65
NetD3_1: D3.1 D4.2 F4.1 IC4.7 R55.1 R58.2 | length 12.4
  L1-TOP w0.2: F4.1@48.566,52.129 49.317,52.881 51.094,52.881 D4.2@51.594,53.381 51.594,52.254 D3.1@51.642,52.207 52.853,52.207 R55.1@52.898,52.161 ; R58.2@52.689,53.994 R58.2@52.898,53.785 ; R55.1@52.904,52.156 R55.1@52.898,52.161 ; IC4.7@56.856,52.523 55.926,52.523 55.499,52.95 53.733,52.95 R58.2@52.898,53.785 ; R55.1@52.898,52.161 R58.2@52.898,53.785
NetD4_1: D4.1 D7.2 F5.1 IC4.6 R58.1 R63.2 | length 11.8
  L1-TOP w0.2: F5.1@48.566,54.447 50.077,54.447 D7.2@50.124,54.494 ; D4.1@50.094,53.381 50.124,53.411 D7.2@50.124,54.494 ; R63.2@54.405,55.337 R58.1@54.405,53.834 ; IC4.6@56.856,53.793 56.848,53.785 R58.1@54.454,53.785 R58.1@54.405,53.834 ; D7.2@50.124,54.494 50.7,54.494 51.2,53.994 52.049,53.994 52.244,54.19 52.244,54.341 52.42,54.517 53.722,54.517 R58.1@54.405,53.834
"NetDisplay DSI interface1_11": "Display DSI interface1.11" R35.2 | length 2
  L1-TOP w0.2: 40.796,48.083 42.693,48.083 R35.2@42.74,48.036
"NetDisplay DSI interface1_12": "Display DSI interface1.12" R36.2 | length 2.2
  L1-TOP w0.2: 40.796,47.083 42.164,47.083 R36.2@42.759,46.489
NetIC1_1: IC1.1 R10.2 | length 3.5
  L1-TOP w0.2: IC1.1@74.146,56.455 74.146,57.246 74.318,57.418 74.318,58.658 75.021,59.361 R10.2@75.021,59.617
NetIC1_20: IC1.20 R7.2 | length 3
  L1-TOP w0.2: IC1.20@74.846,55.755 75.231,55.755 75.476,56 75.476,57.647 R7.2@75.021,58.102
NetIC2_1: IC2.1 R13.2 U2.15 | length 31.7
  L1-TOP w0.2: v1(61.926,31.45) 62.114,31.262 U2.15@65.72,31.262
  L4-BOT w0.2: v1(61.926,31.45) 61.289,32.087 61.289,41.787 59.874,43.202 59.874,48.908 62.746,51.78 62.746,52.55 63.535,53.339 IC2.1@64.231,53.339
  L4-BOT w0.3: IC2.1@64.231,53.339 65.076,53.339 65.31,53.573 65.31,54.45 R13.2@64.77,54.99 ; R13.2@64.762,54.981 R13.2@64.762,54.998
NetIC4_1: IC4.1 R56.2 | length 2.3
  L1-TOP w0.2: IC4.1@62.221,51.253 64.285,51.253 R56.2@64.453,51.084
NetIC4_4: IC4.4 R59.2 | length 2.5
  L1-TOP w0.2: IC4.4@62.221,55.063 63.217,55.063 R59.2@64.261,54.019
NetIC5_2: IC5.2 Q3.2 R65.1 | length 3.8
  L1-TOP w0.4: R65.1@56.635,45.478 56.645,45.468 Q3.2@58.276,45.468 58.276,45.743 59.048,46.515 59.048,47.279 IC5.2@59.093,47.324
NetL1_1: L1.1 U1.3
NetLED1_2: LED1.2 R1.1 | length 1.7
  L4-BOT w0.5: LED1.2@42.255,52.16 42.269,52.146 R1.1@42.269,50.506
NetQ2_2: Q2.2 R20.2 R23.2 | length 3.4
  L4-BOT w0.3: Q2.2@56.99,23.182 57.18,22.992 R20.2@58.771,22.992 R23.2@60.285,22.993
NetQ3_1: Q3.1 R66.2 | length 1.9
  L1-TOP w0.4: Q3.1@60.176,45.468 61.917,45.468 R66.2@62.048,45.337
NetQ4_1: Q4.1 R67.2 | length 3.3
  L1-TOP w0.4: R67.2@25.167,10.716 25.167,11.609 26.494,12.937 Q4.1@26.984,12.937
NetQ5_1: Q5.1 R69.2 | length 3.5
  L1-TOP w0.4: Q5.1@26.68,10.948 27.512,10.948 28.6,12.036 R69.2@28.6,13.147
NetQ6_1: Q6.1 Q9.3 R72.2 | length 5.8
  L4-BOT w0.3: 15.643,24.013 Q9.3@15.643,24.565
  L4-BOT w0.5: R72.2@12.873,20.993 Q6.1@12.873,22.355 12.873,23.07 13.519,23.717 15.346,23.717 15.618,23.988 15.618,24.013 15.643,24.013
NetQ7_1: Q7.1 Q10.3 R74.2 | length 5.9
  L4-BOT w0.3: Q10.3@15.779,34.173 Q10.3@15.779,34.53
  L4-BOT w0.5: R74.2@12.627,30.524 13.13,31.028 Q7.1@13.13,32.192 ; Q7.1@13.13,32.477 13.854,33.201 13.854,33.206 14.118,33.47 15.562,33.47 15.779,33.687 Q10.3@15.779,34.173
NetQ8_1: Q8.1 Q11.3 R76.2 | length 6.7
  L4-BOT w0.3: 15.639,14.2 Q11.3@15.639,14.824
  L4-BOT w0.5: R76.2@12.676,10.538 Q8.1@12.676,12.375 12.676,13.19 13.373,13.887 15.326,13.887 15.639,14.2
NetQ9_2: Q9.2 Q9.5 Q9.6 R71.2 | length 10.9
  L4-BOT w0.5: R71.2@14.155,20.977 14.155,22.477 Q9.6@14.343,22.665 Q9.5@14.993,22.665 14.993,22.308 15.018,22.283 15.018,21.91 15.245,21.683 16.409,21.683 16.857,22.131 16.857,24.68 15.97,25.566 15.354,25.566 14.993,25.205 Q9.2@14.993,24.565
NetQ10_2: Q10.2 Q10.5 Q10.6 R73.2 | length 11.2
  L4-BOT w0.5: R73.2@14.183,30.69 14.183,32.333 Q10.6@14.479,32.63 Q10.5@15.129,32.63 15.129,31.857 15.414,31.572 16.478,31.572 17.286,32.38 17.286,34.208 16.376,35.118 16.376,35.134 16.141,35.37 15.418,35.37 15.154,35.106 15.154,34.831 15.129,34.806 Q10.2@15.129,34.53
NetQ11_2: Q11.2 Q11.5 Q11.6 R75.2 | length 16.1
  L4-BOT w0.5: R75.2@14.214,10.7 14.318,10.803 Q11.6@14.318,12.924 ; Q11.6@14.339,12.924 14.864,12.924 Q11.5@14.967,13.027 ; Q11.5@14.967,12.924 14.967,12.138 15.524,11.582 18.188,11.582 18.913,12.307 18.913,14.74 17.559,16.095 15.326,16.095 14.967,15.736 Q11.2@14.967,14.927
NetR2_2: R2.2 U1.1 | length 6.5
  L4-BOT w0.3: R2.2@24.726,56.097 25.566,55.257 25.566,54.17 25.996,53.74 27.776,53.74 28.492,54.456 U1.1@29.285,54.456
NetR39_2: R39.2 SS.10 | length 2.4
  L4-BOT w0.5: SS.10@2.542,51.092 2.813,50.822 R39.2@2.813,48.853
NetR40_2: R40.2 SS.11 | length 2.5
  L4-BOT w0.5: SS.11@2.542,42.922 2.542,44.853 R40.2@2.924,45.234
NetR57_2: R57.2 USB1.A5 | length 2.7
  L1-TOP w0.2: USB1.A5@6.934,33.931 9.512,33.931 R57.2@9.633,33.81
NetR60_2: R60.2 USB2.A5 | length 2.9
  L1-TOP w0.2: USB2.A5@6.934,23.858 9.755,23.858 R60.2@9.809,23.804
NetR61_2: R61.2 USB1.B5 | length 3.2
  L1-TOP w0.2: USB1.B5@6.934,30.931 7.629,30.931 8.147,31.45 8.997,31.45 R61.2@9.633,30.813
NetR64_2: R64.2 USB2.B5 | length 3.6
  L1-TOP w0.2: USB2.B5@6.934,20.858 7.629,20.858 8.129,21.358 8.882,21.358 R64.2@9.883,20.357